# EAGLE board sensor (tugas nanang) (EAGLE 7.5.0)
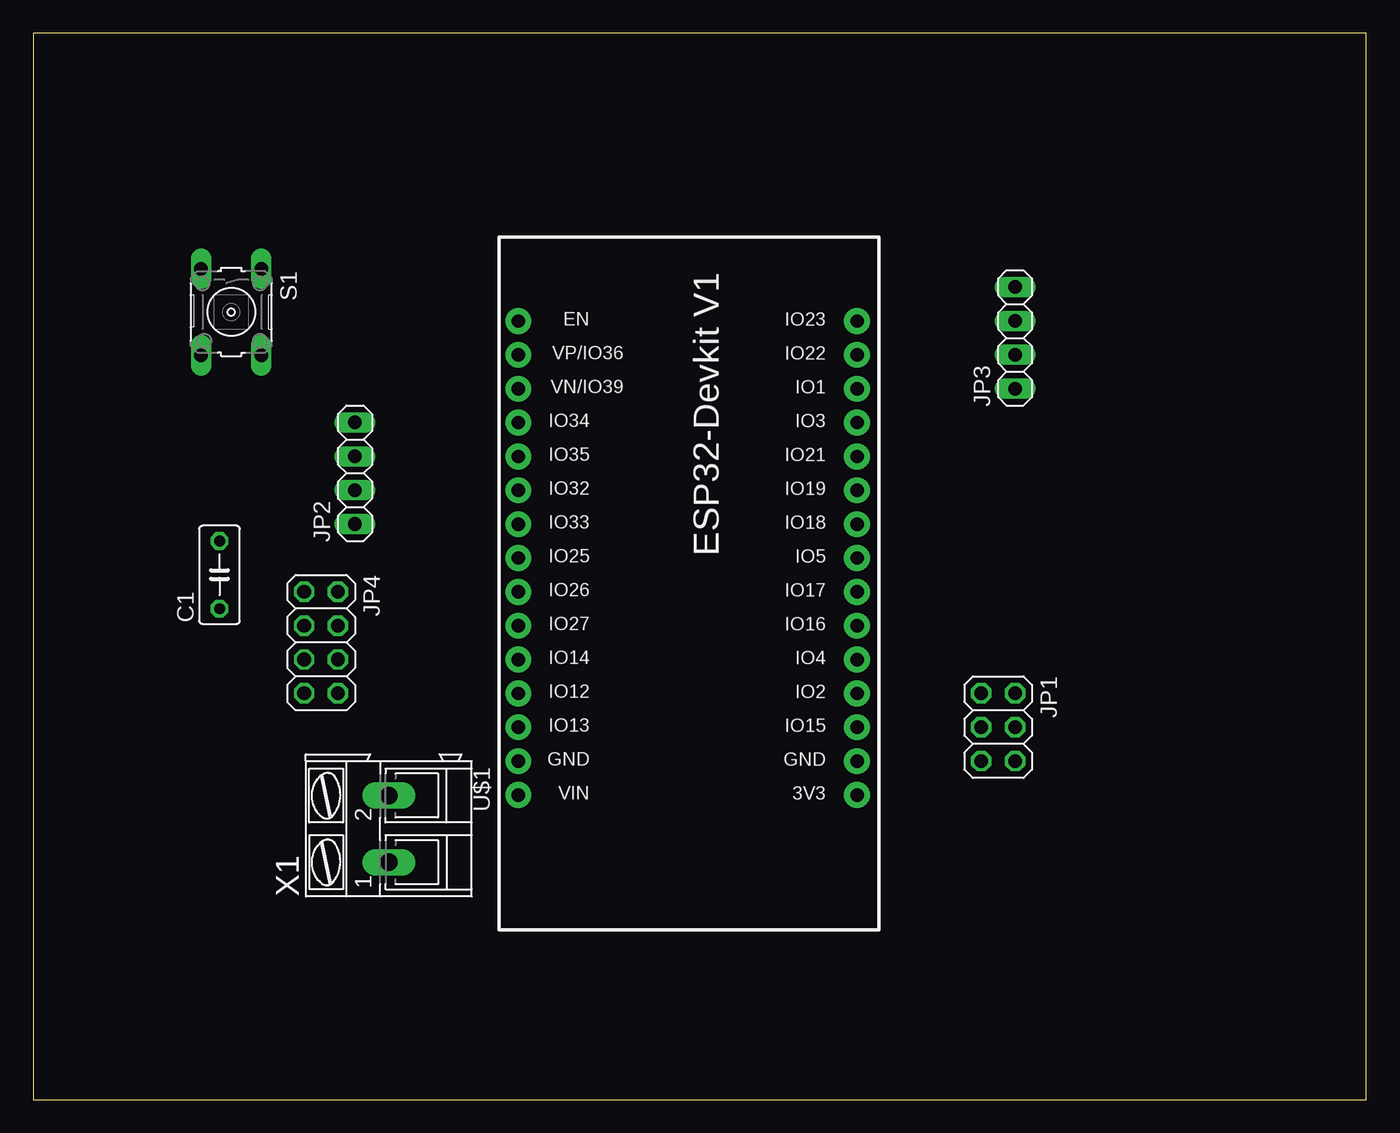
[diagram p0: board, top side]
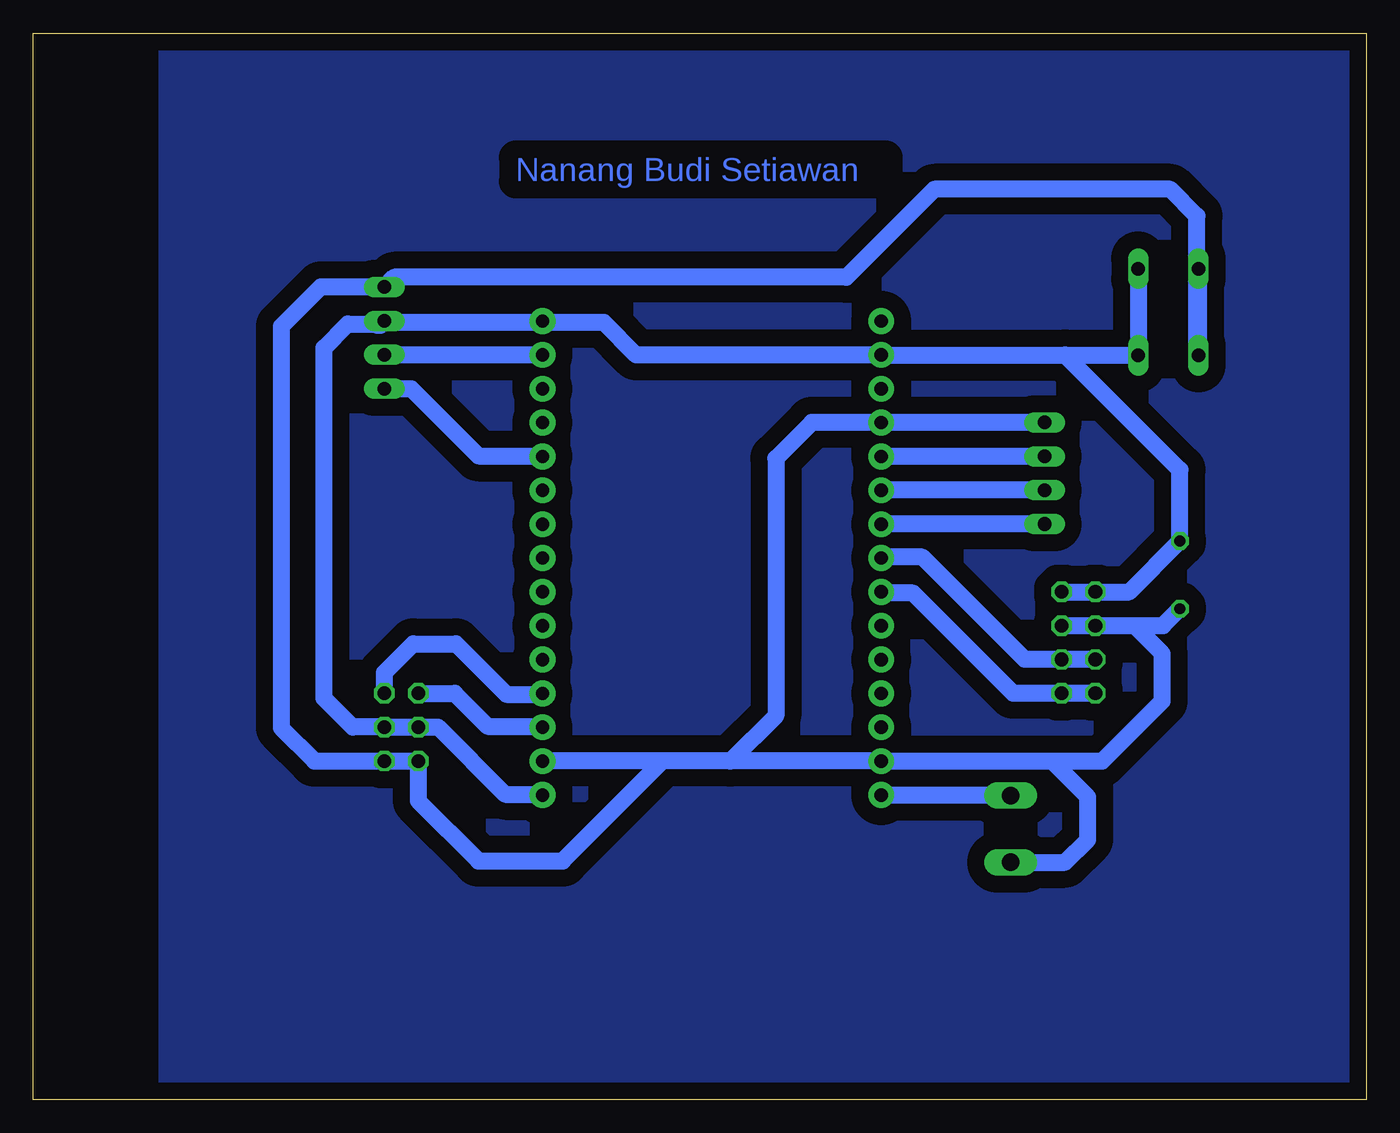
[diagram p1: board, bottom side, seen from below]

Size 100 x 80 mm. Coordinates in mm from the lower left corner, seen from the top.
Outline: 0,0 100,0 100,80 0,80 0,0
Copper layers (1*16): Top 0.035mm / dielectric 1.5mm / Bottom 0.035mm
Design rules "default": minimum track width 10mil, minimum drill 24mil, track to track 8mil, track to pad 8mil, pad to pad 8mil, via to via 8mil, smd to smd 8mil, copper to edge 40mil, drill to drill 8mil, minimum pad ring 10mil, minimum via ring 8mil, stop-mask expansion 4mil, vias tented up to drill 0mil, thermal gap 10mil

## Footprints (pad centres in the part's own frame; a part is rotated, then mirrored left to right if it is on the bottom)
C050-030X075 = drill 0.813 octagon: 1 -2.54,0; 2 2.54,0
2X03 = drill 1.016 octagon: 1 -2.54,-1.27; 2 -2.54,1.27; 3 0,-1.27; 4 0,1.27; 5 2.54,-1.27; 6 2.54,1.27
1X04 = drill 1.016 long: 1 -3.81,0; 2 -1.27,0; 3 1.27,0; 4 3.81,0
2X04 = drill 1.016 octagon: 1 -3.81,-1.27; 2 -3.81,1.27; 3 -1.27,-1.27; 4 -1.27,1.27; 5 1.27,-1.27; 6 1.27,1.27; 7 3.81,-1.27; 8 3.81,1.27
B3F-10XX = drill 1.016 long: 1 -3.251,2.261; 2 3.251,2.261; 3 -3.251,-2.261; 4 3.251,-2.261
ESP32-DEVKITV1 = drill 1 pad 1.93: 3V3 -16.52,-12.27; D1 13.96,-12.27; D2 -8.9,-12.27; D3 11.42,-12.27; D4 -6.36,-12.27; D5 1.26,-12.27; D12 -8.9,13.135; D13 -11.44,13.135; D14 -6.36,13.135; D15 -11.44,-12.27; D16 -3.82,-12.27; D17 -1.28,-12.27; D18 3.8,-12.27; D19 6.34,-12.27; D21 8.88,-12.27; D22 16.5,-12.27; D23 19.04,-12.27; D25 1.26,13.135; D26 -1.28,13.135; D27 -3.82,13.135; D32 6.34,13.135; D33 3.8,13.135; D34 11.42,13.135; D35 8.88,13.135; D36 16.5,13.135; D39 13.96,13.135; EN 19.04,13.135; GND@1 -13.98,13.135; GND@2 -13.98,-12.27; VIN -16.52,13.135
AK300/2 = drill 1.321 long: 1 -2.515,0; 2 2.489,0

## Placement (x,y rotation side)
C1  [C050-030X075]  13.97,39.37 90 top
JP1  [2X03]  72.39,27.94 270 top
JP2  [1X04]  24.13,46.99 90 top
JP3  [1X04]  73.66,57.15 90 top
JP4  [2X04]  21.59,34.29 270 top
S1  [B3F-10XX]  14.85,59.09 270 top
U$1  ESP32DEVKITV1  [ESP32-DEVKITV1]  49.53,39.37 90 top
X1  [AK300/2]  26.67,20.32 90 top

## Library data of the parts
C1 = rcl; SPICEPREFIX: C
JP1-JP4 = pinhead
S1 = switch-omron; MPN: B3F-1000; OC_FARNELL: 176432; OC_NEWARK: 36M3542
U$1 = esp32-devkitv1
X1 = con-ptr500; OC_FARNELL: unknown; OC_NEWARK: unknown

## Nets
GND: C1.1 JP1.5 JP1.6 JP2.4 JP3.4 JP4.3 JP4.4 S1.3 S1.4 U$1.GND@1 U$1.GND@2 X1.1
MOISTURE: JP1.2 U$1.D2
OUT1: JP2.1 U$1.D33
OUT2: JP2.2 U$1.D32
OUT3: JP2.3 U$1.D35
PH: JP1.1 U$1.D15
SCL: JP3.2 U$1.D22
SCL2: JP4.5 JP4.6 U$1.D25
SDA: JP3.1 U$1.D21
SDA2: JP4.7 JP4.8 U$1.D26
V: C1.2 JP1.3 JP1.4 JP3.3 JP4.1 JP4.2 S1.1 S1.2 U$1.3V3 U$1.D36
VIN: U$1.VIN X1.2

## Tracks (layer width: path | path; a pad name or v marks a point on that pad's centre or on a via)
GND
  Bottom 1.27: S1.3 12.59,56.51 12.7,56.4 | 12.7,56.4 12.7,55.95 S1.4 | JP4.4 JP4.3 17.4,35.56 | 17.4,35.56 15.24,35.56 C1.1 | 23.6,25.39 U$1.GND@1 47.7,25.39 | 23.6,25.39 19.81,25.39 15.3,29.9 15.3,33.46 17.4,35.56 | 23.3,50.9 23.4,50.8 JP2.4 41.6,50.8 44.3,48.1 44.3,28.79 47.7,25.39 | 47.7,25.39 52.8,25.39 | 52.8,25.39 U$1.GND@2 | 52.8,25.39 60.29,17.9 66.6,17.9 71.12,22.42 JP1.5 JP1.6 78.9,25.4 81.4,27.9 81.4,58 78.44,60.96 JP3.4 72.92,61.7 39,61.7 32.4,68.3 14.7,68.3 12.7,66.3 12.7,56.4 | X1.1 22.59,17.8 20.9,19.5 20.9,22.69 23.6,25.39
MOISTURE
  Bottom 1.27: JP1.2 73.66,32.04 71.5,34.2 68.3,34.2 64.5,30.4 61.87,30.4 U$1.D2
N$1
  pour Bottom (isolate 1.27): 0,80 90,80 90,0 0,0
OUT1
  Bottom 1.27: JP2.1 36.38,43.18 U$1.D33
OUT2
  Bottom 1.27: JP2.2 36.38,45.72 U$1.D32
OUT3
  Bottom 1.27: JP2.3 36.38,48.26 U$1.D35
PH
  Bottom 1.27: JP1.1 68.38,30.48 65.9,28 61.87,28 U$1.D15
SCL
  Bottom 1.27: U$1.D22 JP3.2
SCL2
  Bottom 1.27: JP4.6 JP4.5 25.62,33.02 33.3,40.7 36.33,40.7 U$1.D25
SDA
  Bottom 1.27: JP3.1 71.64,53.34 66.6,48.3 61.85,48.3 U$1.D21
SDA2
  Bottom 1.27: JP4.8 JP4.7 26.48,30.48 34,38 36.3,38 U$1.D26
V
  Bottom 1.27: U$1.3V3 61.85,22.9 64.6,22.9 69.64,27.94 JP1.3 JP1.4 76.04,27.94 78.2,30.1 78.2,56.4 76.4,58.2 73.88,58.2 JP3.3 73.98,58.1 74.2,58.1 74,58.3 57.2,58.3 54.77,55.87 U$1.D36 22.6,55.87 | 22.6,55.87 17.14,55.87 S1.2 S1.1 | JP4.2 JP4.1 17.78,38.1 C1.2 13.97,47.24 22.6,55.87
VIN
  Bottom 1.27: X1.2 36.35,22.81 U$1.VIN

## Text on the board
Bottom: Nanang Budi Setiawan